# EAGLE board board comp2 12-10-12 (EAGLE 6.3), part 1 of 2
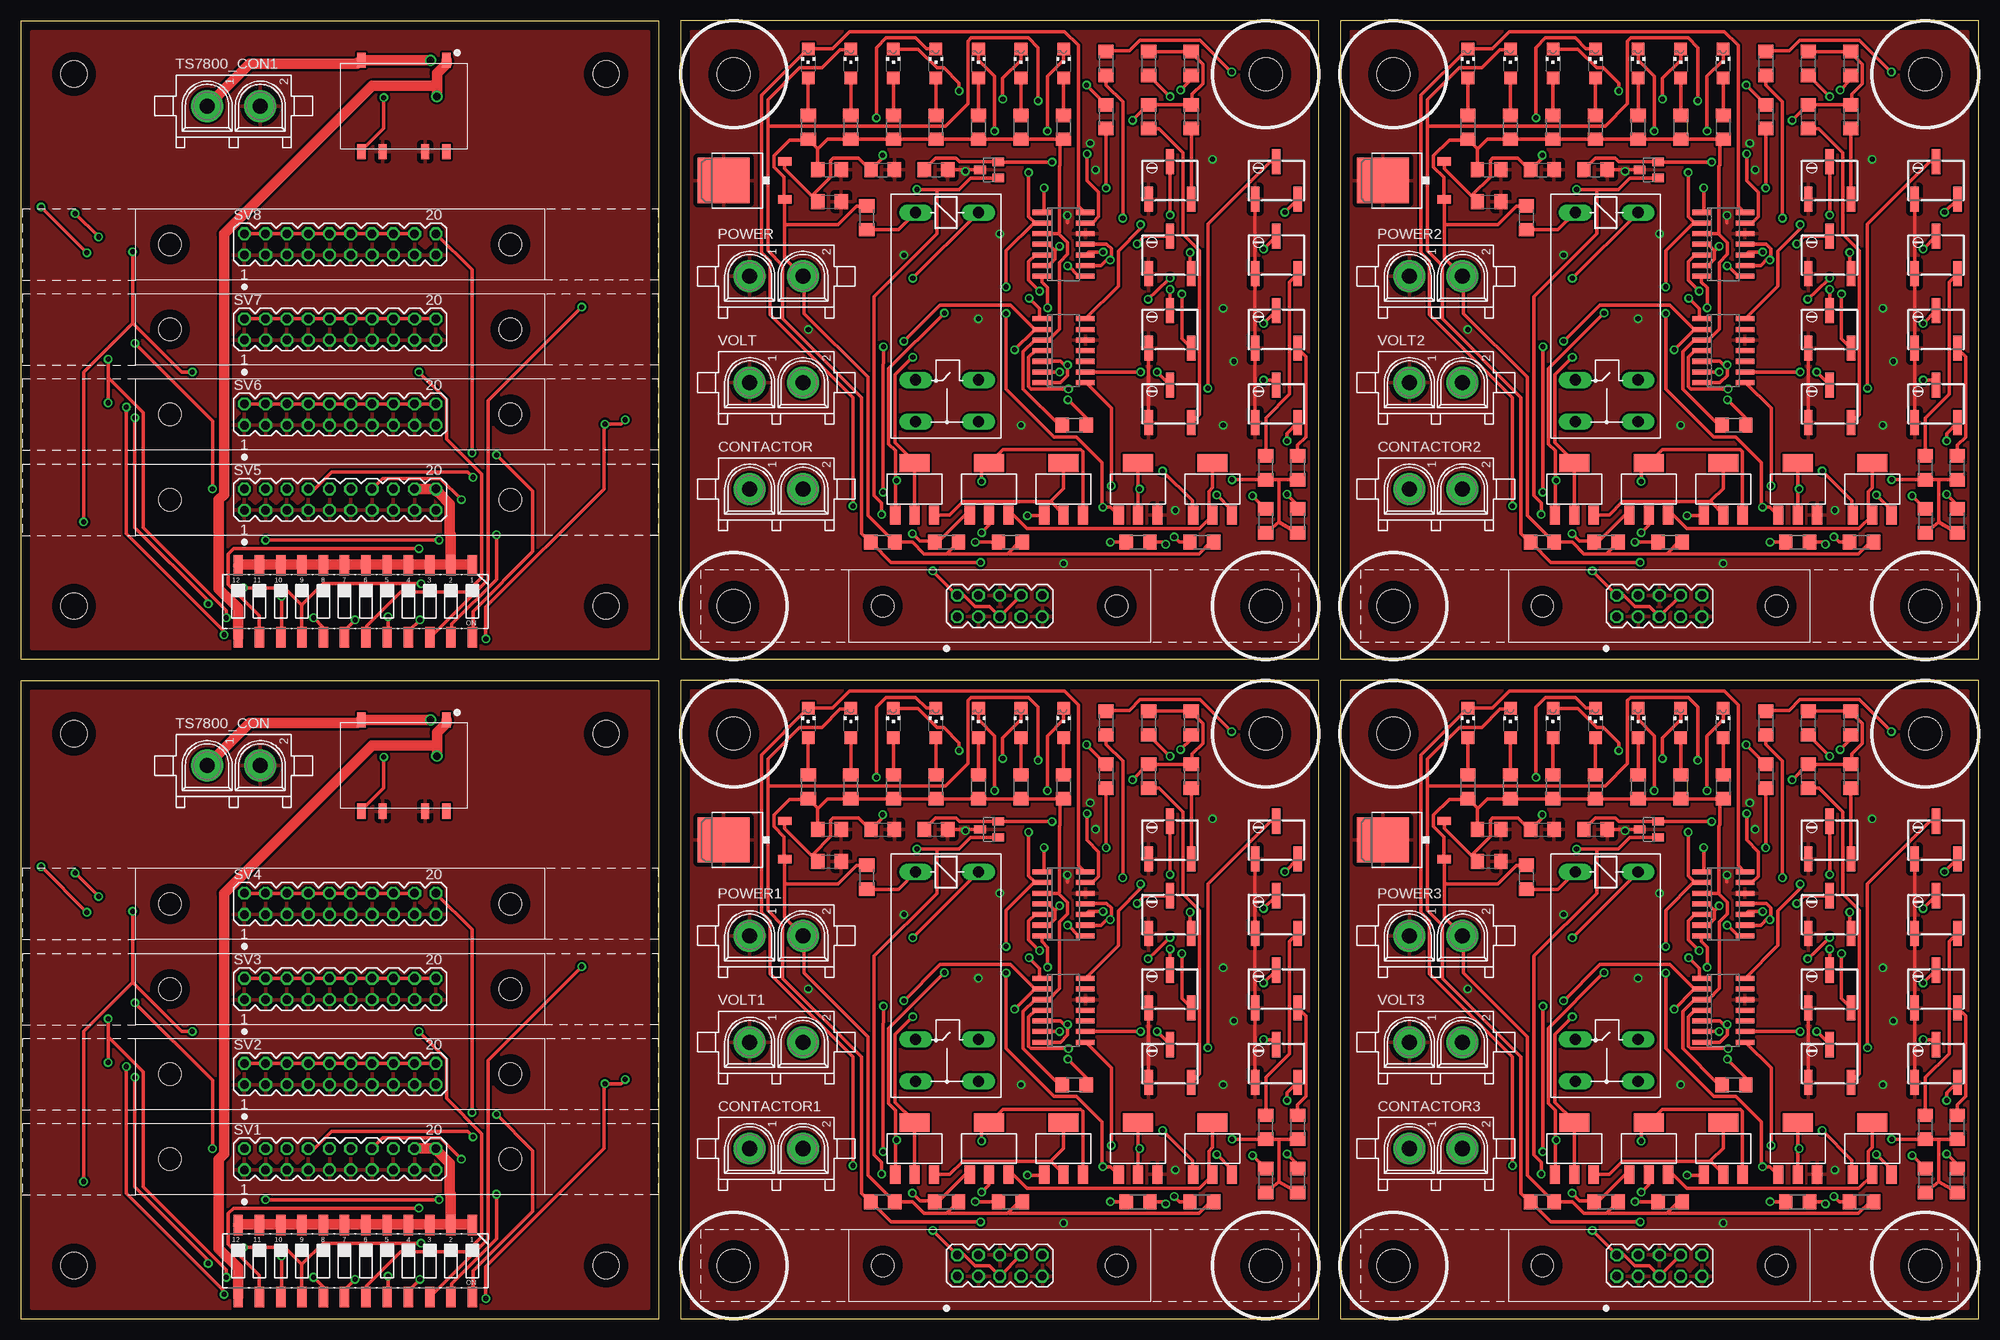
[diagram p0: board, top side]
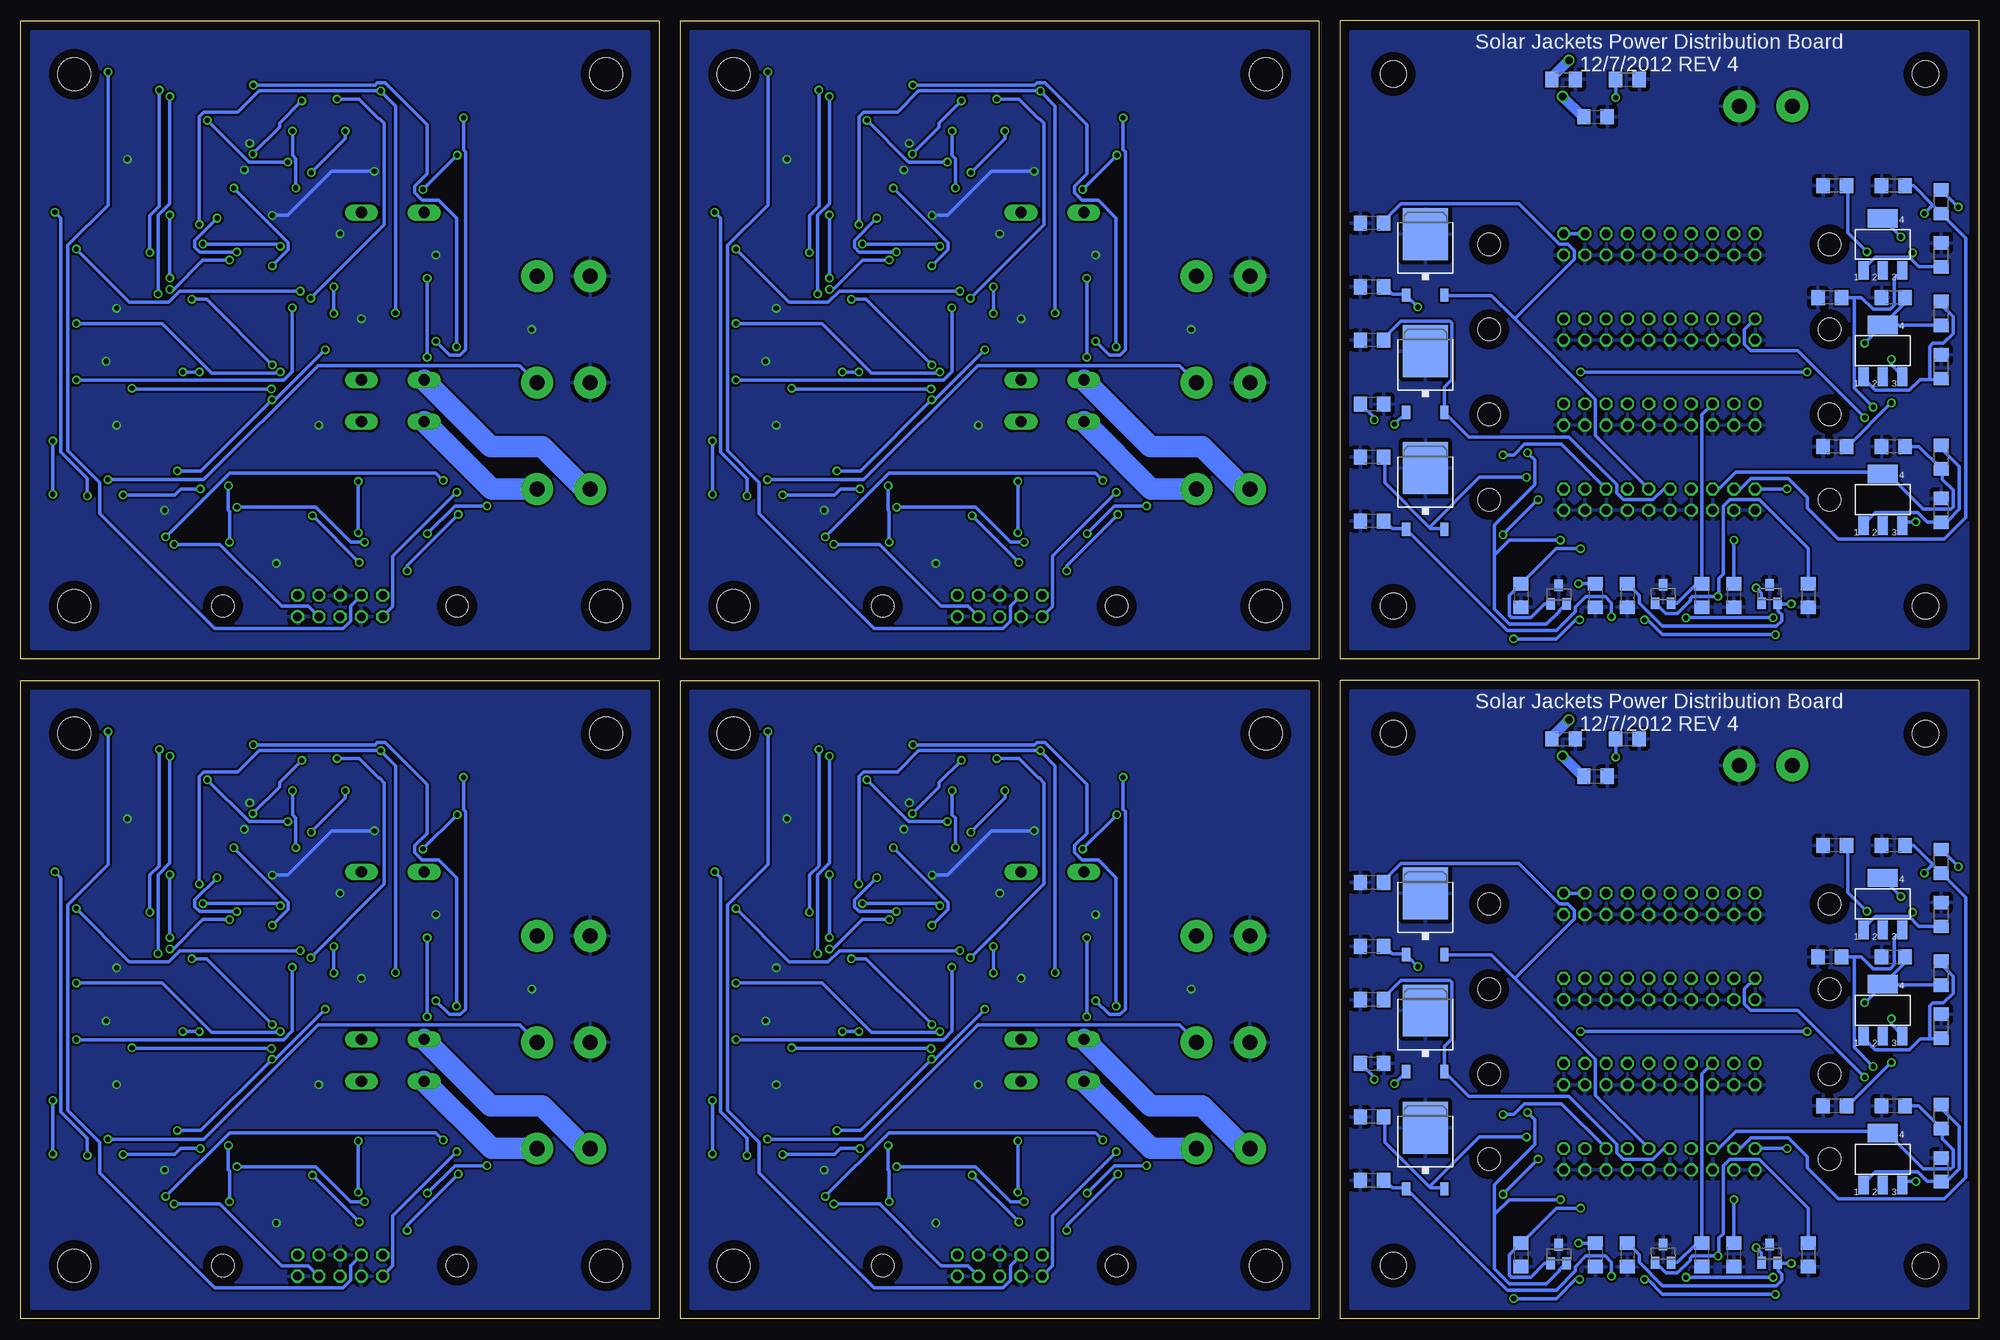
[diagram p1: board, bottom side, seen from below]

Size 233.68 x 154.94 mm. Coordinates in mm from the lower left corner, seen from the top.
Outline: 76.2,0 76.2,76.2 0,76.2 0,0 76.2,0
Outline: 76.2,78.74 76.2,154.94 0,154.94 0,78.74 76.2,78.74
Outline: 78.74,78.74 154.94,78.74 154.94,154.94 78.74,154.94 78.74,78.74
Outline: 78.74,0 154.94,0 154.94,76.2 78.74,76.2 78.74,0
Outline: 157.48,78.74 233.68,78.74 233.68,154.94 157.48,154.94 157.48,78.74
Outline: 157.48,0 233.68,0 233.68,76.2 157.48,76.2 157.48,0
Copper layers (1*16): Top 0.035mm / dielectric 1.5mm / Bottom 0.035mm
Design rules "SJ Design Rules": minimum track width 16mil, minimum drill 24mil, track to track 10mil, track to pad 10mil, pad to pad 10mil, via to via 10mil, smd to smd 10mil, copper to edge 40mil, drill to drill 10mil, minimum pad ring 10mil, minimum via ring 8mil, stop-mask expansion 4mil, vias tented up to drill 0mil, thermal gap 20mil
Net classes: 1 power: width 1.27 mm, drill 0.889 mm
Holes 3.17 mm at 69.85,6.35 6.35,6.35 6.35,69.85 69.85,69.85 69.85,85.09 6.35,85.09 6.35,148.59 69.85,148.59
Holes 3.97 mm at 85.09,85.09 148.59,148.59 85.09,148.59 148.59,85.09 85.09,6.35 148.59,69.85 85.09,69.85 148.59,6.35 163.83,85.09 227.33,148.59 163.83,148.59 227.33,85.09 163.83,6.35 227.33,69.85 163.83,69.85 227.33,6.35

## Footprints (pad centres in the part's own frame; a part is rotated, then mirrored left to right if it is on the bottom)
SOT23 = smd 1 x 1.4: 1 -0.95,-1.1; 2 0.95,-1.1; 3 0,1.1
C1206 = smd 1.6 x 1.8: 1 -1.4,0; 2 1.4,0
350428-1 = drill 1.8 pad 3.81: 1 -3.175,0; 2 3.175,0
RTRIMTS63Y = smd 1 x 3: 1 -2.55,-2.25; 2 0,2.25; 3 2.55,-2.25
SOT223 = smd 1.219 x 2.235: 1 -2.311,-3.099; 2 0,-3.099; 3 2.311,-3.099 | smd 3.6 x 2.2: 4 0,3.099
SO14 = smd 0.6 x 2.2: 1 -3.81,-2.6; 2 -2.54,-2.6; 3 -1.27,-2.6; 4 0,-2.6; 5 1.27,-2.6; 6 2.54,-2.6; 7 3.81,-2.6; 8 3.81,2.6; 9 2.54,2.6; 10 1.27,2.6; 11 0,2.6; 12 -1.27,2.6; 13 -2.54,2.6; 14 -3.81,2.6
TO252 = smd 1 x 1.6: 1 -2.28,-4.8; 2 2.28,-4.8 | smd 5.4 x 6.2: 3 0,2.5
G2REA = drill 1.321 long: 1 -2.54,-3.683; 2 -2.54,3.81; P 17.45,-3.683; P@ 17.45,3.81; S 22.454,-3.683; S@ 22.454,3.81
CHIPLED_1206 = smd 1.5 x 1.5: A 0,-1.75; C 0,1.75
R1206 = smd 1.6 x 1.803: 1 -1.422,0; 2 1.422,0
CTS-219-12 = smd 1.13 x 2.44: 1 -13.97,-4.3; 2 -11.43,-4.3; 3 -8.89,-4.3; 4 -6.35,-4.3; 5 -3.81,-4.3; 6 -1.27,-4.3; 7 1.27,-4.3; 8 3.81,-4.3; 9 6.35,-4.3; 10 8.89,-4.3; 11 11.43,-4.3; 12 13.97,-4.3; 13 13.97,4.3; 14 11.43,4.3; 15 8.89,4.3; 16 6.35,4.3; 17 3.81,4.3; 18 1.27,4.3; 19 -1.27,4.3; 20 -3.81,4.3; 21 -6.35,4.3; 22 -8.89,4.3; 23 -11.43,4.3; 24 -13.97,4.3
MA10-2 = drill 1.016 octagon: 1 -11.43,-1.27; 2 -11.43,1.27; 3 -8.89,-1.27; 4 -8.89,1.27; 5 -6.35,-1.27; 6 -6.35,1.27; 7 -3.81,-1.27; 8 -3.81,1.27; 9 -1.27,-1.27; 10 -1.27,1.27; 11 1.27,-1.27; 12 1.27,1.27; 13 3.81,-1.27; 14 3.81,1.27; 15 6.35,-1.27; 16 6.35,1.27; 17 8.89,-1.27; 18 8.89,1.27; 19 11.43,-1.27; 20 11.43,1.27 | hole 2.692: -20.32,0; 20.32,0
MA05-2 = drill 1.016 octagon: 1 -5.08,-1.27; 2 -5.08,1.27; 3 -2.54,-1.27; 4 -2.54,1.27; 5 0,-1.27; 6 0,1.27; 7 2.54,-1.27; 8 2.54,1.27; 9 5.08,-1.27; 10 5.08,1.27 | hole 2.692: -13.97,0; 13.97,0
350759-4 = drill 1.8 pad 3.81: 1 -3.175,0; 2 3.175,0
V7805 = smd 0.991 x 1.803: 1 0,0.902; 5 10.16,0.902; 6 10.16,11.798; 7 7.62,11.798; 9 2.54,11.798; 10 0,11.798

## Placement (x,y rotation side)
3V1  MAX6103  [SOT23]  24.94,86.51 0 bottom
3V2  MAX6103  [SOT23]  37.64,86.51 0 bottom
3V3  MAX6103  [SOT23]  24.94,7.77 0 bottom
3V4  MAX6103  [SOT23]  37.64,7.77 0 bottom
3V5  MAX6103  [SOT23]  50.11,7.72 0 bottom
3V6  MAX6103  [SOT23]  50.11,86.46 0 bottom
3V7  MAX6103  [SOT23]  115.57,137.16 90 top
3V8  MAX6103  [SOT23]  115.57,58.42 90 top
3V9  MAX6103  [SOT23]  194.31,137.16 90 top
3V10  MAX6103  [SOT23]  194.31,58.42 90 top
317CAP1  .33uF  [C1206]  17.14,135.25 180 bottom
317CAP2  1uF  [C1206]  10.16,104.14 180 bottom
317CAP3  .33uF  [C1206]  17.14,56.52 180 bottom
317CAP4  .33uF  [C1206]  17.78,121.92 180 bottom
317CAP5  1uF  [C1206]  10.16,135.25 180 bottom
317CAP6  .33uF  [C1206]  17.14,104.14 180 bottom
317CAP7  1uF  [C1206]  10.16,121.92 180 bottom
317CAP8  1uF  [C1206]  10.16,25.4 180 bottom
317CAP9  .33uF  [C1206]  17.78,43.18 180 bottom
317CAP10  1uF  [C1206]  10.16,56.52 180 bottom
317CAP11  .33uF  [C1206]  17.14,25.4 180 bottom
317CAP12  1uF  [C1206]  10.16,43.18 180 bottom
6103CAP1  1uF  [C1206]  45.72,86.36 270 bottom
6103CAP2  1uF  [C1206]  41.91,86.36 270 bottom
6103CAP3  1uF  [C1206]  20.32,86.36 270 bottom
6103CAP4  1uF  [C1206]  33.02,86.36 270 bottom
6103CAP5  1uF  [C1206]  54.61,86.36 270 bottom
6103CAP6  1uF  [C1206]  29.21,86.36 270 bottom
6103CAP7  1uF  [C1206]  45.72,7.62 270 bottom
6103CAP8  1uF  [C1206]  41.91,7.62 270 bottom
6103CAP9  1uF  [C1206]  20.32,7.62 270 bottom
6103CAP10  1uF  [C1206]  33.02,7.62 270 bottom
6103CAP11  1uF  [C1206]  54.61,7.62 270 bottom
6103CAP12  1uF  [C1206]  29.21,7.62 270 bottom
6103CAP13  1uF  [C1206]  102.87,137.16 0 top
6103CAP14  1uF  [C1206]  109.22,137.16 0 top
6103CAP15  1uF  [C1206]  102.87,58.42 0 top
6103CAP16  1uF  [C1206]  109.22,58.42 0 top
6103CAP17  1uF  [C1206]  181.61,137.16 0 top
6103CAP18  1uF  [C1206]  187.96,137.16 0 top
6103CAP19  1uF  [C1206]  181.61,58.42 0 top
6103CAP20  1uF  [C1206]  187.96,58.42 0 top
7805CAP1  1uF  [C1206]  96.52,137.16 0 top
7805CAP2  1uF  [C1206]  96.52,133.35 0 top
7805CAP3  1uF  [C1206]  96.52,54.61 0 top
7805CAP4  1uF  [C1206]  96.52,58.42 0 top
7805CAP5  1uF  [C1206]  175.26,133.35 0 top
7805CAP6  1uF  [C1206]  175.26,137.16 0 top
7805CAP7  1uF  [C1206]  175.26,54.61 0 top
7805CAP8  1uF  [C1206]  175.26,58.42 0 top
C1  1uF  [C1206]  72.39,44.45 180 bottom
C2  1uF  [C1206]  72.39,52.07 180 bottom
C3  1uF  [C1206]  72.39,30.48 0 bottom
C4  1uF  [C1206]  72.39,38.1 180 bottom
C5  1uF  [C1206]  72.39,16.51 180 bottom
C6  1uF  [C1206]  72.39,24.13 180 bottom
C7  1uF  [C1206]  72.39,123.19 180 bottom
C8  1uF  [C1206]  72.39,130.81 180 bottom
C9  1uF  [C1206]  72.39,109.22 0 bottom
C10  1uF  [C1206]  72.39,116.84 180 bottom
C11  1uF  [C1206]  72.39,102.87 180 bottom
C12  1uF  [C1206]  72.39,95.25 180 bottom
CONTACTOR  350428-1  [350428-1]  90.17,99.06 0 top
CONTACTOR1  350428-1  [350428-1]  90.17,20.32 0 top
CONTACTOR2  350428-1  [350428-1]  168.91,99.06 0 top
CONTACTOR3  350428-1  [350428-1]  168.91,20.32 0 top
CURRENT_TRIM  1k  [RTRIMTS63Y]  137.16,109.22 0 top
CURRENT_TRIM1  1k  [RTRIMTS63Y]  137.16,30.48 0 top
CURRENT_TRIM2  1k  [RTRIMTS63Y]  215.9,109.22 0 top
CURRENT_TRIM3  1k  [RTRIMTS63Y]  215.9,30.48 0 top
IC1  LM317  [SOT223]  11.43,97.79 0 bottom
IC2  LM317  [SOT223]  11.43,128.27 0 bottom
IC3  LM317  [SOT223]  11.43,115.57 0 bottom
IC4  LM317  [SOT223]  11.43,19.05 0 bottom
IC5  LM317  [SOT223]  11.43,49.53 0 bottom
IC6  LM317  [SOT223]  11.43,36.83 0 bottom
IC7  LM339D  [SO14]  124.46,128.27 270 top
IC8  7805DT  [TO252]  86.36,135.89 90 top
IC9  LM339D  [SO14]  124.46,115.57 270 top
IC10  LM339D  [SO14]  124.46,49.53 270 top
IC11  7805DT  [TO252]  86.36,57.15 90 top
IC12  LM339D  [SO14]  124.46,36.83 270 top
IC13  LM339D  [SO14]  203.2,128.27 270 top
IC14  7805DT  [TO252]  165.1,135.89 90 top
IC15  LM339D  [SO14]  203.2,115.57 270 top
IC16  LM339D  [SO14]  203.2,49.53 270 top
IC17  7805DT  [TO252]  165.1,57.15 90 top
IC18  LM339D  [SO14]  203.2,36.83 270 top
K1  G2REA  [G2REA]  110.49,129.54 270 top
K2  G2REA  [G2REA]  110.49,50.8 270 top
K3  G2REA  [G2REA]  189.23,129.54 270 top
K4  G2REA  [G2REA]  189.23,50.8 270 top
OVER_CRIT  10k  [RTRIMTS63Y]  149.86,135.89 0 top
OVER_CRIT1  10k  [RTRIMTS63Y]  149.86,57.15 0 top
OVER_CRIT2  10k  [RTRIMTS63Y]  228.6,135.89 0 top
OVER_CRIT3  10k  [RTRIMTS63Y]  228.6,57.15 0 top
OVER_TRIM  1k  [RTRIMTS63Y]  137.16,135.89 0 top
OVER_TRIM1  1k  [RTRIMTS63Y]  137.16,57.15 0 top
OVER_TRIM2  1k  [RTRIMTS63Y]  215.9,135.89 0 top
OVER_TRIM3  1k  [RTRIMTS63Y]  215.9,57.15 0 top
OVER_WARN  10k  [RTRIMTS63Y]  149.86,118.11 0 top
OVER_WARN1  10k  [RTRIMTS63Y]  149.86,39.37 0 top
OVER_WARN2  10k  [RTRIMTS63Y]  228.6,118.11 0 top
OVER_WARN3  10k  [RTRIMTS63Y]  228.6,39.37 0 top
OVERCURRENT  [CHIPLED_1206]  104.14,149.86 0 top
OVERCURRENT1  [CHIPLED_1206]  104.14,71.12 0 top
OVERCURRENT2  [CHIPLED_1206]  182.88,149.86 0 top
OVERCURRENT3  [CHIPLED_1206]  182.88,71.12 0 top
OVERCURRENT_FET  N-HEXFET-2D_SOT232-  [SOT223]  106.68,99.06 0 top
OVERCURRENT_FET1  N-HEXFET-2D_SOT232-  [SOT223]  106.68,20.32 0 top
OVERCURRENT_FET2  N-HEXFET-2D_SOT232-  [SOT223]  185.42,99.06 0 top
OVERCURRENT_FET3  N-HEXFET-2D_SOT232-  [SOT223]  185.42,20.32 0 top
OVERTEMP1  [CHIPLED_1206]  93.98,149.86 0 top
OVERTEMP1_FET  N-HEXFET-2D_SOT232-  [SOT223]  115.57,99.06 0 top
OVERTEMP1_FET1  N-HEXFET-2D_SOT232-  [SOT223]  115.57,20.32 0 top
OVERTEMP1_FET2  N-HEXFET-2D_SOT232-  [SOT223]  194.31,99.06 0 top
OVERTEMP1_FET3  N-HEXFET-2D_SOT232-  [SOT223]  194.31,20.32 0 top
OVERTEMP2  [CHIPLED_1206]  99.06,149.86 0 top
OVERTEMP2_FET  N-HEXFET-2D_SOT232-  [SOT223]  124.46,99.06 0 top
OVERTEMP2_FET1  N-HEXFET-2D_SOT232-  [SOT223]  124.46,20.32 0 top
OVERTEMP2_FET2  N-HEXFET-2D_SOT232-  [SOT223]  203.2,99.06 0 top
OVERTEMP2_FET3  N-HEXFET-2D_SOT232-  [SOT223]  203.2,20.32 0 top
OVERTEMP3  [CHIPLED_1206]  93.98,71.12 0 top
OVERTEMP4  [CHIPLED_1206]  99.06,71.12 0 top
OVERTEMP5  [CHIPLED_1206]  172.72,149.86 0 top
OVERTEMP6  [CHIPLED_1206]  177.8,149.86 0 top
OVERTEMP7  [CHIPLED_1206]  172.72,71.12 0 top
OVERTEMP8  [CHIPLED_1206]  177.8,71.12 0 top
OVERVOLT  [CHIPLED_1206]  109.22,149.86 0 top
OVERVOLT1  [CHIPLED_1206]  109.22,71.12 0 top
OVERVOLT2  [CHIPLED_1206]  187.96,149.86 0 top
OVERVOLT3  [CHIPLED_1206]  187.96,71.12 0 top
OVERVOLT_FET  N-HEXFET-2D_SOT232-  [SOT223]  142.24,99.06 0 top
OVERVOLT_FET1  N-HEXFET-2D_SOT232-  [SOT223]  142.24,20.32 0 top
OVERVOLT_FET2  N-HEXFET-2D_SOT232-  [SOT223]  220.98,99.06 0 top
OVERVOLT_FET3  N-HEXFET-2D_SOT232-  [SOT223]  220.98,20.32 0 top
OVERVOLT_WARN  [CHIPLED_1206]  119.38,149.86 0 top
OVERVOLT_WARN1  [CHIPLED_1206]  119.38,71.12 0 top
OVERVOLT_WARN2  [CHIPLED_1206]  198.12,149.86 0 top
OVERVOLT_WARN3  [CHIPLED_1206]  198.12,71.12 0 top
POWER  350428-1  [350428-1]  90.17,124.46 0 top
POWER1  350428-1  [350428-1]  90.17,45.72 0 top
POWER2  350428-1  [350428-1]  168.91,124.46 0 top
POWER3  350428-1  [350428-1]  168.91,45.72 0 top
PWR_1  7805DT  [TO252]  66.04,48.26 0 bottom
PWR_2  7805DT  [TO252]  66.04,34.29 0 bottom
PWR_3  7805DT  [TO252]  66.04,20.32 0 bottom
PWR_4  7805DT  [TO252]  66.04,127 0 bottom
PWR_5  7805DT  [TO252]  66.04,113.03 0 bottom
PWR_6  7805DT  [TO252]  66.04,99.06 0 bottom
R1  220  [R1206]  4.45,102.87 90 bottom
R2  361  [R1206]  4.45,96.52 90 bottom
R3  220  [R1206]  4.45,133.35 90 bottom
R4  361  [R1206]  4.45,127 90 bottom
R5  220  [R1206]  4.45,120.02 90 bottom
R6  361  [R1206]  4.45,113.67 90 bottom
R7  220  [R1206]  4.45,24.13 90 bottom
R8  361  [R1206]  4.45,17.78 90 bottom
R9  220  [R1206]  4.45,54.61 90 bottom
R10  361  [R1206]  4.45,48.26 90 bottom
R11  220  [R1206]  4.45,41.27 90 bottom
R12  361  [R1206]  4.45,34.92 90 bottom
R13  100k  [R1206]  148.59,101.6 270 top
R14  100k  [R1206]  152.4,95.25 270 top
R15  100  [R1206]  129.54,143.51 90 top
R16  100  [R1206]  129.54,149.86 90 top
R17  100  [R1206]  134.62,149.86 90 top
R18  100  [R1206]  139.7,149.86 90 top
R19  1k  [R1206]  114.3,142.24 270 top
R20  1k  [R1206]  124.46,142.24 270 top
R21  1k  [R1206]  93.98,142.24 270 top
R22  1k  [R1206]  99.06,142.24 270 top
R23  10k  [R1206]  118.11,92.71 0 top
R24  100  [R1206]  100.97,131.44 90 top
R25  10k  [R1206]  125.73,106.68 180 top
R26  10k  [R1206]  110.49,92.71 0 top
R27  10k  [R1206]  102.87,92.71 0 top
R28  10k  [R1206]  140.97,92.71 0 top
R29  100k  [R1206]  148.59,95.25 270 top
R30  100k  [R1206]  152.4,101.6 270 top
R31  1k  [R1206]  133.35,92.71 0 top
R32  100  [R1206]  134.62,143.51 90 top
R33  100  [R1206]  139.7,143.51 90 top
R34  1k  [R1206]  109.22,142.24 270 top
R35  1k  [R1206]  119.38,142.24 270 top
R36  1k  [R1206]  104.14,142.24 270 top
R37  100k  [R1206]  148.59,22.86 270 top
R38  100k  [R1206]  152.4,16.51 270 top
R39  100  [R1206]  129.54,64.77 90 top
R40  100  [R1206]  129.54,71.12 90 top
R41  100  [R1206]  134.62,71.12 90 top
R42  100  [R1206]  139.7,71.12 90 top
R43  1k  [R1206]  114.3,63.5 270 top
R44  1k  [R1206]  124.46,63.5 270 top
R45  1k  [R1206]  93.98,63.5 270 top
R46  1k  [R1206]  99.06,63.5 270 top
R47  10k  [R1206]  118.11,13.97 0 top
R48  100  [R1206]  100.97,52.7 90 top
R49  10k  [R1206]  125.73,27.94 180 top
R50  10k  [R1206]  110.49,13.97 0 top
R51  10k  [R1206]  102.87,13.97 0 top
R52  10k  [R1206]  140.97,13.97 0 top
R53  100k  [R1206]  148.59,16.51 270 top
R54  100k  [R1206]  152.4,22.86 270 top
R55  1k  [R1206]  133.35,13.97 0 top
R56  100  [R1206]  134.62,64.77 90 top
R57  100  [R1206]  139.7,64.77 90 top
R58  1k  [R1206]  109.22,63.5 270 top
R59  1k  [R1206]  119.38,63.5 270 top
R60  1k  [R1206]  104.14,63.5 270 top
R61  100k  [R1206]  227.33,101.6 270 top
R62  100k  [R1206]  231.14,95.25 270 top
R63  100  [R1206]  208.28,143.51 90 top
R64  100  [R1206]  208.28,149.86 90 top
R65  100  [R1206]  213.36,149.86 90 top
R66  100  [R1206]  218.44,149.86 90 top
R67  1k  [R1206]  193.04,142.24 270 top
R68  1k  [R1206]  203.2,142.24 270 top
R69  1k  [R1206]  172.72,142.24 270 top
R70  1k  [R1206]  177.8,142.24 270 top
R71  10k  [R1206]  196.85,92.71 0 top
R72  100  [R1206]  179.71,131.44 90 top
R73  10k  [R1206]  204.47,106.68 180 top
R74  10k  [R1206]  189.23,92.71 0 top
R75  10k  [R1206]  181.61,92.71 0 top
R76  10k  [R1206]  219.71,92.71 0 top
R77  100k  [R1206]  227.33,95.25 270 top
R78  100k  [R1206]  231.14,101.6 270 top
R79  1k  [R1206]  212.09,92.71 0 top
R80  100  [R1206]  213.36,143.51 90 top
R81  100  [R1206]  218.44,143.51 90 top
R82  1k  [R1206]  187.96,142.24 270 top
R83  1k  [R1206]  198.12,142.24 270 top
R84  1k  [R1206]  182.88,142.24 270 top
R85  100k  [R1206]  227.33,22.86 270 top
R86  100k  [R1206]  231.14,16.51 270 top
R87  100  [R1206]  208.28,64.77 90 top
R88  100  [R1206]  208.28,71.12 90 top
R89  100  [R1206]  213.36,71.12 90 top
R90  100  [R1206]  218.44,71.12 90 top
R91  1k  [R1206]  193.04,63.5 270 top
R92  1k  [R1206]  203.2,63.5 270 top
R93  1k  [R1206]  172.72,63.5 270 top
R94  1k  [R1206]  177.8,63.5 270 top
R95  10k  [R1206]  196.85,13.97 0 top
R96  100  [R1206]  179.71,52.7 90 top
R97  10k  [R1206]  204.47,27.94 180 top
R98  10k  [R1206]  189.23,13.97 0 top
R99  10k  [R1206]  181.61,13.97 0 top
R100  10k  [R1206]  219.71,13.97 0 top
R101  100k  [R1206]  227.33,16.51 270 top
R102  100k  [R1206]  231.14,22.86 270 top
R103  1k  [R1206]  212.09,13.97 0 top
R104  100  [R1206]  213.36,64.77 90 top
R105  100  [R1206]  218.44,64.77 90 top
R106  1k  [R1206]  187.96,63.5 270 top
R107  1k  [R1206]  198.12,63.5 270 top
R108  1k  [R1206]  182.88,63.5 270 top
S1  219-12  [CTS-219-12]  39.9,6.91 180 top
S2  219-12  [CTS-219-12]  39.9,85.65 180 top
SV1  AMPLATCH-20  [MA10-2]  38.1,19.05 0 top
SV2  AMPLATCH-20  [MA10-2]  38.1,29.21 0 top
SV3  AMPLATCH-20  [MA10-2]  38.1,39.37 0 top
SV4  AMPLATCH-20  [MA10-2]  38.1,49.53 0 top
SV5  AMPLATCH-20  [MA10-2]  38.1,97.79 0 top
SV6  AMPLATCH-20  [MA10-2]  38.1,107.95 0 top
SV7  AMPLATCH-20  [MA10-2]  38.1,118.11 0 top
SV8  AMPLATCH-20  [MA10-2]  38.1,128.27 0 top
SV9  AMP_LATCH_10  [MA05-2]  116.84,85.09 0 top
SV10  AMP_LATCH_10  [MA05-2]  116.84,6.35 0 top
SV11  AMP_LATCH_10  [MA05-2]  195.58,85.09 0 top
SV12  AMP_LATCH_10  [MA05-2]  195.58,6.35 0 top
TEMP_TRIM  1k  [RTRIMTS63Y]  137.16,118.11 0 top
TEMP_TRIM1  1k  [RTRIMTS63Y]  137.16,39.37 0 top
TEMP_TRIM2  1k  [RTRIMTS63Y]  215.9,118.11 0 top
TEMP_TRIM3  1k  [RTRIMTS63Y]  215.9,39.37 0 top
TS7800_CON  350759-4  [350759-4]  25.4,66.04 0 top
TS7800_CON1  350759-4  [350759-4]  25.4,144.78 0 top
U$1  V7805  [V7805]  50.8,151.13 180 top
U$2  V7805  [V7805]  50.8,72.39 180 top
UNDER_CRIT  10k  [RTRIMTS63Y]  149.86,127 0 top
UNDER_CRIT1  10k  [RTRIMTS63Y]  149.86,48.26 0 top
UNDER_CRIT2  10k  [RTRIMTS63Y]  228.6,127 0 top
UNDER_CRIT3  10k  [RTRIMTS63Y]  228.6,48.26 0 top
UNDER_TRIM  1k  [RTRIMTS63Y]  137.16,127 0 top
UNDER_TRIM1  1k  [RTRIMTS63Y]  137.16,48.26 0 top
UNDER_TRIM2  1k  [RTRIMTS63Y]  215.9,127 0 top
UNDER_TRIM3  1k  [RTRIMTS63Y]  215.9,48.26 0 top
UNDER_WARN  10k  [RTRIMTS63Y]  149.86,109.22 0 top
UNDER_WARN1  10k  [RTRIMTS63Y]  149.86,30.48 0 top
UNDER_WARN2  10k  [RTRIMTS63Y]  228.6,109.22 0 top
UNDER_WARN3  10k  [RTRIMTS63Y]  228.6,30.48 0 top
UNDERVOLT  [CHIPLED_1206]  114.3,149.86 0 top
UNDERVOLT1  [CHIPLED_1206]  114.3,71.12 0 top
UNDERVOLT2  [CHIPLED_1206]  193.04,149.86 0 top
UNDERVOLT3  [CHIPLED_1206]  193.04,71.12 0 top
UNDERVOLT_FET  N-HEXFET-2D_SOT232-  [SOT223]  133.35,99.06 0 top
UNDERVOLT_FET1  N-HEXFET-2D_SOT232-  [SOT223]  133.35,20.32 0 top
UNDERVOLT_FET2  N-HEXFET-2D_SOT232-  [SOT223]  212.09,99.06 0 top
UNDERVOLT_FET3  N-HEXFET-2D_SOT232-  [SOT223]  212.09,20.32 0 top
UNDERVOLT_WARN  [CHIPLED_1206]  124.46,149.86 0 top
UNDERVOLT_WARN1  [CHIPLED_1206]  124.46,71.12 0 top
UNDERVOLT_WARN2  [CHIPLED_1206]  203.2,149.86 0 top
UNDERVOLT_WARN3  [CHIPLED_1206]  203.2,71.12 0 top
V7805_C1  1uF  [C1206]  41.91,147.96 0 bottom
V7805_C2  1uF  [C1206]  45.72,143.51 0 bottom
V7805_C3  1uF  [C1206]  49.53,147.96 0 bottom
V7805_C4  1uF  [C1206]  41.91,69.22 0 bottom
V7805_C5  1uF  [C1206]  45.72,64.77 0 bottom
V7805_C6  1uF  [C1206]  49.53,69.22 0 bottom
VOLT  350428-1  [350428-1]  90.17,111.76 0 top
VOLT1  350428-1  [350428-1]  90.17,33.02 0 top
VOLT2  350428-1  [350428-1]  168.91,111.76 0 top
VOLT3  350428-1  [350428-1]  168.91,33.02 0 top

## Library data of the parts
3V1-3V10 = SolarJacketsADC
317CAP1-317CAP12 6103CAP1-6103CAP20 7805CAP1-7805CAP8 C1-C12 CURRENT_TRIM CURRENT_TRIM1-CURRENT_TRIM3 OVER_CRIT OVER_CRIT1-OVER_CRIT3 OVER_TRIM OVER_TRIM1-OVER_TRIM3 OVER_WARN OVER_WARN1-OVER_WARN3 R1-R108 TEMP_TRIM TEMP_TRIM1-TEMP_TRIM3 UNDER_CRIT UNDER_CRIT1-UNDER_CRIT3 UNDER_TRIM UNDER_TRIM1-UNDER_TRIM3 UNDER_WARN UNDER_WARN1-UNDER_WARN3 V7805_C1-V7805_C6 = rcl
CONTACTOR CONTACTOR1-CONTACTOR3 POWER POWER1-POWER3 VOLT VOLT1-VOLT3 = con-amp
IC1-IC18 PWR_1-PWR_6 = linear
K1-K4 = relay; OC_FARNELL: unknown; OC_NEWARK: unknown
OVERCURRENT OVERCURRENT1-OVERCURRENT3 OVERTEMP1-OVERTEMP8 OVERVOLT OVERVOLT1-OVERVOLT3 OVERVOLT_WARN OVERVOLT_WARN1-OVERVOLT_WARN3 UNDERVOLT UNDERVOLT1-UNDERVOLT3 UNDERVOLT_WARN UNDERVOLT_WARN1-UNDERVOLT_WARN3 = led
OVERCURRENT_FET OVERCURRENT_FET1-OVERCURRENT_FET3 OVERTEMP1_FET OVERTEMP1_FET1-OVERTEMP1_FET3 OVERTEMP2_FET OVERTEMP2_FET1-OVERTEMP2_FET3 OVERVOLT_FET OVERVOLT_FET1-OVERVOLT_FET3 UNDERVOLT_FET UNDERVOLT_FET1-UNDERVOLT_FET3 = transistor-power
S1 S2 = switch-dil; OC_FARNELL: unknown; OC_NEWARK: unknown
SV1-SV8 = SolarJacketsADC; PART_NUM: 5499160-1
SV9-SV12 = SolarJacketsADC; PART_NUM: 5499922-1
TS7800_CON TS7800_CON1 = con-amp; NEG: -; POS: +
U$1 U$2 = V7805

## Nets
3.3V1: 317CAP8.1 IC4.4 R7.1 SV1.6
3.3V1_EN: 317CAP3.1 IC4.3 S1.19
3.3V1_EN1: 317CAP1.1 IC1.3 S2.19
3.3V2: 317CAP10.1 IC5.4 R9.1 SV1.4
3.3V2_EN: 317CAP9.1 IC5.3 S1.18
3.3V2_EN1: 317CAP4.1 IC2.3 S2.18
3.3V3: 317CAP12.1 IC6.4 R11.1 SV1.2
3.3V3_EN: 317CAP11.1 IC6.3 S1.17
3.3V3_EN1: 317CAP6.1 IC3.3 S2.17
3.3V4: 317CAP7.1 IC3.4 R5.1 SV5.2
3.3V5: 317CAP2.1 IC1.4 R1.1 SV5.6
3.3V6: 317CAP5.1 IC2.4 R3.1 SV5.4
5V: 3V7.1 6103CAP13.1 7805CAP2.1 IC8.2 SV9.2 SV9.5 SV9.8
5V1: C2.1 PWR_1.2 SV1.12
5V1_EN: C1.1 PWR_1.1 S1.22
5V1_EN1: C7.1 PWR_4.1 S2.22
5V2: C4.1 PWR_2.2 SV1.10
5V2_EN: C3.1 PWR_2.1 S1.21
5V2_EN1: C9.1 PWR_5.1 S2.21
5V3: C6.1 PWR_3.2 SV1.8
5V3_EN: C5.1 PWR_3.1 S1.20
5V3_EN1: C12.1 PWR_6.1 S2.20
5V4: C11.1 PWR_6.2 SV5.8
5V5: C10.1 PWR_5.2 SV5.10
5V6: C8.1 PWR_4.2 SV5.12
5V7: 3V8.1 6103CAP15.1 7805CAP3.1 IC11.2 SV10.2 SV10.5 SV10.8
5V8: 3V9.1 6103CAP17.1 7805CAP5.1 IC14.2 SV11.2 SV11.5 SV11.8
5V9: 3V10.1 6103CAP19.1 7805CAP7.1 IC17.2 SV12.2 SV12.5 SV12.8
12V [power]: S1.1 S1.2 S1.3 S1.4 S1.5 S1.6 S1.7 S1.8 S1.9 S1.10 S1.11 S1.12 SV1.18 SV1.20
12V1 [power]: S2.1 S2.2 S2.3 S2.4 S2.5 S2.6 S2.7 S2.8 S2.9 S2.10 S2.11 S2.12 SV5.18 SV5.20
12V1_EN: S1.24 SV1.16
12V1_EN1: S2.24 SV5.16
12V2: 7805CAP1.1 IC7.3 IC8.1 IC9.3 POWER.2 R19.2 R20.2 R21.2 R22.2 R23.2 R24.2 R25.2 R26.2 R27.2 R28.2 R34.2 R35.2 R36.2
12V2_EN: S1.23 SV1.14
12V2_EN1: S2.23 SV5.14
12V3: 7805CAP4.1 IC10.3 IC11.1 IC12.3 POWER1.2 R43.2 R44.2 R45.2 R46.2 R47.2 R48.2 R49.2 R50.2 R51.2 R52.2 R58.2 R59.2 R60.2
12V4: 7805CAP6.1 IC13.3 IC14.1 IC15.3 POWER2.2 R67.2 R68.2 R69.2 R70.2 R71.2 R72.2 R73.2 R74.2 R75.2 R76.2 R82.2 R83.2 R84.2
12V5: 7805CAP8.1 IC16.3 IC17.1 IC18.3 POWER3.2 R91.2 R92.2 R93.2 R94.2 R95.2 R96.2 R97.2 R98.2 R99.2 R100.2 R106.2 R107.2 R108.2
96V: R13.2 R14.2 R29.2 R30.2 VOLT.2
96V1: R37.2 R38.2 R53.2 R54.2 VOLT1.2
96V2: R61.2 R62.2 R77.2 R78.2 VOLT2.2
96V3: R85.2 R86.2 R101.2 R102.2 VOLT3.2
CONTACTOR_IN: CONTACTOR.2 K1.S
CONTACTOR_IN1: CONTACTOR1.2 K2.S
CONTACTOR_IN2: CONTACTOR2.2 K3.S
CONTACTOR_IN3: CONTACTOR3.2 K4.S
CONTACTOR_OUT: CONTACTOR.1 K1.P
CONTACTOR_OUT1: CONTACTOR1.1 K2.P
CONTACTOR_OUT2: CONTACTOR2.1 K3.P
CONTACTOR_OUT3: CONTACTOR3.1 K4.P
CURRENT: R31.2 SV9.7
CURRENT1: R55.2 SV10.7
CURRENT2: R79.2 SV11.7
CURRENT3: R103.2 SV12.7
GND: 3V3.3 3V4.3 3V5.3 317CAP3.2 317CAP8.2 317CAP9.2 317CAP10.2 317CAP11.2 317CAP12.2 6103CAP7.2 6103CAP8.2 6103CAP9.2 6103CAP10.2 6103CAP11.2 6103CAP12.2 C1.2 C2.2 C3.2 C4.2 C5.2 C6.2 PWR_1.3 PWR_2.3 PWR_3.3 R8.2 R10.2 R12.2 SV1.1 SV1.3 SV1.5 SV1.7 SV1.9 SV1.11 SV1.13 SV1.15 SV1.17 SV1.19 SV2.1 SV2.3 SV2.5 SV2.7 SV2.9 SV2.11 SV2.13 SV2.15 SV2.17 SV2.19 SV3.1 SV3.3 SV3.5 SV3.7 SV3.9 SV3.11 SV3.13 SV3.15 SV3.17 SV3.19 SV4.1 SV4.3 SV4.5 SV4.7 SV4.9 SV4.11 SV4.13 SV4.15 SV4.17 SV4.19 TS7800_CON.2 U$2.7 U$2.9 V7805_C4.2 V7805_C5.2 V7805_C6.2
GND1: 3V1.3 3V2.3 3V6.3 317CAP1.2 317CAP2.2 317CAP4.2 317CAP5.2 317CAP6.2 317CAP7.2 6103CAP1.2 6103CAP2.2 6103CAP3.2 6103CAP4.2 6103CAP5.2 6103CAP6.2 C7.2 C8.2 C9.2 C10.2 C11.2 C12.2 PWR_4.3 PWR_5.3 PWR_6.3 R2.2 R4.2 R6.2 SV5.1 SV5.3 SV5.5 SV5.7 SV5.9 SV5.11 SV5.13 SV5.15 SV5.17 SV5.19 SV6.1 SV6.3 SV6.5 SV6.7 SV6.9 SV6.11 SV6.13 SV6.15 SV6.17 SV6.19 SV7.1 SV7.3 SV7.5 SV7.7 SV7.9 SV7.11 SV7.13 SV7.15 SV7.17 SV7.19 SV8.1 SV8.3 SV8.5 SV8.7 SV8.9 SV8.11 SV8.13 SV8.15 SV8.17 SV8.19 TS7800_CON1.2 U$1.7 U$1.9 V7805_C1.2 V7805_C2.2 V7805_C3.2
GND2: 3V7.3 6103CAP13.2 6103CAP14.2 7805CAP1.2 7805CAP2.2 CURRENT_TRIM.1 IC7.12 IC8.3 IC9.12 OVER_CRIT.1 OVER_TRIM.1 OVER_WARN.1 POWER.1 SV9.3 SV9.6 SV9.9 TEMP_TRIM.1 UNDER_CRIT.1 UNDER_TRIM.1 UNDER_WARN.1 UNDERVOLT_FET.3 VOLT.1
GND3: 3V8.3 6103CAP15.2 6103CAP16.2 7805CAP3.2 7805CAP4.2 CURRENT_TRIM1.1 IC10.12 IC11.3 IC12.12 OVER_CRIT1.1 OVER_TRIM1.1 OVER_WARN1.1 POWER1.1 SV10.3 SV10.6 SV10.9 TEMP_TRIM1.1 UNDER_CRIT1.1 UNDER_TRIM1.1 UNDER_WARN1.1 UNDERVOLT_FET1.3 VOLT1.1
GND4: 3V9.3 6103CAP17.2 6103CAP18.2 7805CAP5.2 7805CAP6.2 CURRENT_TRIM2.1 IC13.12 IC14.3 IC15.12 OVER_CRIT2.1 OVER_TRIM2.1 OVER_WARN2.1 POWER2.1 SV11.3 SV11.6 SV11.9 TEMP_TRIM2.1 UNDER_CRIT2.1 UNDER_TRIM2.1 UNDER_WARN2.1 UNDERVOLT_FET2.3 VOLT2.1
GND5: 3V10.3 6103CAP19.2 6103CAP20.2 7805CAP7.2 7805CAP8.2 CURRENT_TRIM3.1 IC16.12 IC17.3 IC18.12 OVER_CRIT3.1 OVER_TRIM3.1 OVER_WARN3.1 POWER3.1 SV12.3 SV12.6 SV12.9 TEMP_TRIM3.1 UNDER_CRIT3.1 UNDER_TRIM3.1 UNDER_WARN3.1 UNDERVOLT_FET3.3 VOLT3.1
N$1: U$2.6 V7805_C4.1
N$2: IC1.1 R1.2 R2.1
N$3: IC2.1 R3.2 R4.1
N$4: IC3.1 R5.2 R6.1
N$5: U$1.6 V7805_C1.1
N$6: IC7.7 UNDER_WARN.2
N$7: IC7.5 UNDER_CRIT.2
N$8: IC7.9 IC7.11 TEMP_TRIM.2
N$9: R13.1 UNDER_CRIT.3
N$10: R14.1 UNDER_WARN.3
N$11: IC7.4 IC7.6 UNDER_TRIM.2
N$12: IC4.1 R7.2 R8.1
N$13: IC5.1 R9.2 R10.1
N$14: IC6.1 R11.2 R12.1
N$15: R18.1 UNDER_TRIM.3
N$16: R17.1 TEMP_TRIM.3
N$17: R19.1 UNDERVOLT.A
N$18: R20.1 UNDERVOLT_WARN.A
N$19: OVERTEMP1.A R21.1
N$20: OVERTEMP2.A R22.1
N$21: IC7.8 R15.1
N$22: IC7.10 R16.1
N$23: CURRENT_TRIM.2 IC9.9
N$24: OVER_WARN.3 R30.1
N$25: IC9.6 OVER_WARN.2
N$26: IC9.4 OVER_CRIT.2
N$27: IC9.5 IC9.7 OVER_TRIM.2
N$28: OVER_TRIM.3 R33.1
N$29: CURRENT_TRIM.3 R32.1
N$30: OVERVOLT.A R34.1
N$31: OVERVOLT_WARN.A R35.1
N$32: OVERCURRENT.A R36.1
N$33: OVER_CRIT.3 R29.1
N$34: IC9.8 R31.1
N$35: K1.1 R24.1
N$36: K1.2 OVERCURRENT_FET.2 OVERCURRENT_FET.4
N$37: OVERCURRENT_FET.3 OVERTEMP2_FET.2 OVERTEMP2_FET.4
N$38: OVERTEMP1_FET.2 OVERTEMP1_FET.4 OVERTEMP2_FET.3
N$39: OVERTEMP1_FET.3 OVERVOLT_FET.2 OVERVOLT_FET.4
N$40: OVERVOLT_FET.3 UNDERVOLT_FET.2 UNDERVOLT_FET.4
N$41: IC10.7 UNDER_WARN1.2
N$42: IC10.5 UNDER_CRIT1.2
N$43: IC10.9 IC10.11 TEMP_TRIM1.2
N$44: R37.1 UNDER_CRIT1.3
N$45: R38.1 UNDER_WARN1.3
N$46: IC10.4 IC10.6 UNDER_TRIM1.2
N$47: R42.1 UNDER_TRIM1.3
N$48: R41.1 TEMP_TRIM1.3
N$49: R43.1 UNDERVOLT1.A
N$50: R44.1 UNDERVOLT_WARN1.A
N$51: OVERTEMP3.A R45.1
N$52: OVERTEMP4.A R46.1
N$53: IC10.8 R39.1
N$54: IC10.10 R40.1
N$55: CURRENT_TRIM1.2 IC12.9
N$56: OVER_WARN1.3 R54.1
N$57: IC12.5 IC12.7 OVER_TRIM1.2
N$58: OVER_TRIM1.3 R57.1
N$59: CURRENT_TRIM1.3 R56.1
N$60: OVERVOLT1.A R58.1
N$61: OVERVOLT_WARN1.A R59.1
N$62: OVERCURRENT1.A R60.1
N$63: IC12.6 OVER_WARN1.2
N$64: IC12.4 OVER_CRIT1.2
N$65: OVER_CRIT1.3 R53.1
N$66: IC12.8 R55.1
N$67: K2.1 R48.1
N$68: K2.2 OVERCURRENT_FET1.2 OVERCURRENT_FET1.4
N$69: OVERCURRENT_FET1.3 OVERTEMP2_FET1.2 OVERTEMP2_FET1.4
N$70: OVERTEMP1_FET1.2 OVERTEMP1_FET1.4 OVERTEMP2_FET1.3
N$71: OVERTEMP1_FET1.3 OVERVOLT_FET1.2 OVERVOLT_FET1.4
N$72: OVERVOLT_FET1.3 UNDERVOLT_FET1.2 UNDERVOLT_FET1.4
N$73: IC13.7 UNDER_WARN2.2
N$74: IC13.5 UNDER_CRIT2.2
N$75: IC13.9 IC13.11 TEMP_TRIM2.2
N$76: R61.1 UNDER_CRIT2.3
N$77: R62.1 UNDER_WARN2.3
N$78: IC13.4 IC13.6 UNDER_TRIM2.2
N$79: R66.1 UNDER_TRIM2.3
N$80: R65.1 TEMP_TRIM2.3
N$81: R67.1 UNDERVOLT2.A
N$82: R68.1 UNDERVOLT_WARN2.A
N$83: OVERTEMP5.A R69.1
N$84: OVERTEMP6.A R70.1
N$85: IC13.8 R63.1
N$86: IC13.10 R64.1
N$87: CURRENT_TRIM2.2 IC15.9
N$88: OVER_WARN2.3 R78.1
N$89: IC15.5 IC15.7 OVER_TRIM2.2
N$90: OVER_TRIM2.3 R81.1
N$91: CURRENT_TRIM2.3 R80.1
N$92: OVERVOLT2.A R82.1
N$93: OVERVOLT_WARN2.A R83.1
N$94: OVERCURRENT2.A R84.1
N$95: IC15.6 OVER_WARN2.2
N$96: IC15.4 OVER_CRIT2.2
N$97: OVER_CRIT2.3 R77.1
N$98: IC15.8 R79.1
N$99: K3.1 R72.1
N$100: K3.2 OVERCURRENT_FET2.2 OVERCURRENT_FET2.4
N$101: OVERCURRENT_FET2.3 OVERTEMP2_FET2.2 OVERTEMP2_FET2.4
N$102: OVERTEMP1_FET2.2 OVERTEMP1_FET2.4 OVERTEMP2_FET2.3
N$103: OVERTEMP1_FET2.3 OVERVOLT_FET2.2 OVERVOLT_FET2.4
N$104: OVERVOLT_FET2.3 UNDERVOLT_FET2.2 UNDERVOLT_FET2.4
N$105: IC16.7 UNDER_WARN3.2
N$106: IC16.5 UNDER_CRIT3.2
N$107: IC16.9 IC16.11 TEMP_TRIM3.2
N$108: R85.1 UNDER_CRIT3.3
N$109: R86.1 UNDER_WARN3.3
N$110: IC16.4 IC16.6 UNDER_TRIM3.2
N$111: R90.1 UNDER_TRIM3.3
N$112: R89.1 TEMP_TRIM3.3
N$113: R91.1 UNDERVOLT3.A
N$114: R92.1 UNDERVOLT_WARN3.A
N$115: OVERTEMP7.A R93.1
N$116: OVERTEMP8.A R94.1
N$117: IC16.8 R87.1
N$118: IC16.10 R88.1
N$119: CURRENT_TRIM3.2 IC18.9
N$120: OVER_WARN3.3 R102.1
N$121: IC18.5 IC18.7 OVER_TRIM3.2
N$122: OVER_TRIM3.3 R105.1
N$123: CURRENT_TRIM3.3 R104.1
N$124: OVERVOLT3.A R106.1
N$125: OVERVOLT_WARN3.A R107.1
N$126: OVERCURRENT3.A R108.1
N$127: IC18.6 OVER_WARN3.2
N$128: IC18.4 OVER_CRIT3.2
N$129: OVER_CRIT3.3 R101.1
N$130: IC18.8 R103.1
N$131: K4.1 R96.1
N$132: K4.2 OVERCURRENT_FET3.2 OVERCURRENT_FET3.4
N$133: OVERCURRENT_FET3.3 OVERTEMP2_FET3.2 OVERTEMP2_FET3.4
N$134: OVERTEMP1_FET3.2 OVERTEMP1_FET3.4 OVERTEMP2_FET3.3
N$135: OVERTEMP1_FET3.3 OVERVOLT_FET3.2 OVERVOLT_FET3.4
N$136: OVERVOLT_FET3.3 UNDERVOLT_FET3.2 UNDERVOLT_FET3.4
OVERCURRENT_CRITICAL: IC9.14 OVERCURRENT.C OVERCURRENT_FET.1 R28.1
OVERCURRENT_CRITICAL1: IC12.14 OVERCURRENT1.C OVERCURRENT_FET1.1 R52.1
OVERCURRENT_CRITICAL2: IC15.14 OVERCURRENT2.C OVERCURRENT_FET2.1 R76.1
OVERCURRENT_CRITICAL3: IC18.14 OVERCURRENT3.C OVERCURRENT_FET3.1 R100.1
OVERTEMP_CRITICAL1: IC7.14 OVERTEMP1.C OVERTEMP1_FET.1 R26.1
OVERTEMP_CRITICAL2: IC7.13 OVERTEMP2.C OVERTEMP2_FET.1 R27.1
OVERTEMP_CRITICAL3: IC10.14 OVERTEMP1_FET1.1 OVERTEMP3.C R50.1
OVERTEMP_CRITICAL4: IC10.13 OVERTEMP2_FET1.1 OVERTEMP4.C R51.1
OVERTEMP_CRITICAL5: IC13.14 OVERTEMP1_FET2.1 OVERTEMP5.C R74.1
OVERTEMP_CRITICAL6: IC13.13 OVERTEMP2_FET2.1 OVERTEMP6.C R75.1
OVERTEMP_CRITICAL7: IC16.14 OVERTEMP1_FET3.1 OVERTEMP7.C R98.1
OVERTEMP_CRITICAL8: IC16.13 OVERTEMP2_FET3.1 OVERTEMP8.C R99.1
OVERVOLT_CRITICAL: IC9.2 OVERVOLT.C OVERVOLT_FET.1 R25.1
OVERVOLT_CRITICAL1: IC12.2 OVERVOLT1.C OVERVOLT_FET1.1 R49.1
OVERVOLT_CRITICAL2: IC15.2 OVERVOLT2.C OVERVOLT_FET2.1 R73.1
OVERVOLT_CRITICAL3: IC18.2 OVERVOLT3.C OVERVOLT_FET3.1 R97.1
OVERVOLT_WARNING1: IC9.1 OVERVOLT_WARN.C
OVERVOLT_WARNING2: IC12.1 OVERVOLT_WARN1.C
OVERVOLT_WARNING3: IC15.1 OVERVOLT_WARN2.C
OVERVOLT_WARNING4: IC18.1 OVERVOLT_WARN3.C
TEMP1: R15.2 SV9.1
TEMP2: R16.2 SV9.4
TEMP3: R39.2 SV10.1
TEMP4: R40.2 SV10.4
TEMP5: R63.2 SV11.1
TEMP6: R64.2 SV11.4
TEMP7: R87.2 SV12.1
TEMP8: R88.2 SV12.4
TS7800_+ [power]: TS7800_CON.1 U$2.5 V7805_C6.1
TS7800_+1 [power]: TS7800_CON1.1 U$1.5 V7805_C3.1
TS7800_EN [power]: S1.13 U$2.1 V7805_C5.1
TS7800_EN1 [power]: S2.13 U$1.1 V7805_C2.1
UNDERVOLT_CRITICAL: IC7.2 R23.1 UNDERVOLT.C UNDERVOLT_FET.1
UNDERVOLT_CRITICAL1: IC10.2 R47.1 UNDERVOLT1.C UNDERVOLT_FET1.1
UNDERVOLT_CRITICAL2: IC13.2 R71.1 UNDERVOLT2.C UNDERVOLT_FET2.1
UNDERVOLT_CRITICAL3: IC16.2 R95.1 UNDERVOLT3.C UNDERVOLT_FET3.1
UNDERVOLT_WARNING: IC7.1 UNDERVOLT_WARN.C
UNDERVOLT_WARNING1: IC10.1 UNDERVOLT_WARN1.C
UNDERVOLT_WARNING2: IC13.1 UNDERVOLT_WARN2.C
UNDERVOLT_WARNING3: IC16.1 UNDERVOLT_WARN3.C
VREF: 3V7.2 6103CAP14.1 R17.2 R18.2 R32.2 R33.2
VREF1: 3V3.2 6103CAP8.1 SV3.2 SV3.4 SV3.6 SV3.8 SV3.10 SV3.12 SV3.14 SV3.16 SV3.18 SV3.20
VREF1_EN: 3V3.1 6103CAP7.1 S1.16
VREF1_EN1: 3V1.1 6103CAP1.1 S2.16
VREF2: 3V4.2 6103CAP10.1 SV2.2 SV2.4 SV2.6 SV2.8 SV2.10 SV2.12 SV2.14 SV2.16 SV2.18 SV2.20
VREF2_EN: 3V4.1 6103CAP9.1 S1.15
VREF2_EN1: 3V2.1 6103CAP3.1 S2.15
VREF3: 3V5.2 6103CAP12.1 SV4.2 SV4.4 SV4.6 SV4.8 SV4.10 SV4.12 SV4.14 SV4.16 SV4.18 SV4.20
VREF3_EN: 3V5.1 6103CAP11.1 S1.14
VREF3_EN1: 3V6.1 6103CAP5.1 S2.14
VREF4: 3V1.2 6103CAP2.1 SV7.2 SV7.4 SV7.6 SV7.8 SV7.10 SV7.12 SV7.14 SV7.16 SV7.18 SV7.20
VREF5: 3V2.2 6103CAP4.1 SV6.2 SV6.4 SV6.6 SV6.8 SV6.10 SV6.12 SV6.14 SV6.16 SV6.18 SV6.20
VREF6: 3V6.2 6103CAP6.1 SV8.2 SV8.4 SV8.6 SV8.8 SV8.10 SV8.12 SV8.14 SV8.16 SV8.18 SV8.20
VREF7: 3V8.2 6103CAP16.1 R41.2 R42.2 R56.2 R57.2
VREF8: 3V9.2 6103CAP18.1 R65.2 R66.2 R80.2 R81.2
VREF9: 3V10.2 6103CAP20.1 R89.2 R90.2 R104.2 R105.2

## Tracks (layer width: path | path; a pad name or v marks a point on that pad's centre or on a via)
3.3V1
  Bottom 0.406: 317CAP8.1 7.11,25.4 4.45,22.73 R7.1 4.32,22.61 4.32,21.46 3.05,20.19 3.05,18.16 3.3,17.91 6.6,17.91 10.79,22.1 11.3,22.1 IC4.4 11.43,22.23 11.56,22.35 28.96,22.35 30.99,20.32 SV1.6
3.3V1_EN  (via drill 0.61)
  Top 0.406: 13.34,40.13 v13.34,48.64 | 13.34,40.13 7.49,34.29 v7.49,16.38 | v47.5,34.29 50.8,30.99 50.8,26.29 54.99,22.1 54.99,9.78 53.21,8 45.34,8 41.27,3.94 41.27,2.67 S1.19 | v20.45,34.29 19.18,34.29 13.34,40.13
  Bottom 0.406: v13.34,48.64 15.62,50.93 15.62,56.52 317CAP3.1 | v7.49,16.38 8.64,16.38 9.02,16 IC4.3 | v20.45,34.29 v47.5,34.29
3.3V1_EN1  (via drill 0.61)
  Top 0.406: 13.34,118.87 v13.34,127.38 | 13.34,118.87 7.49,113.03 v7.49,95.12 | v47.5,113.03 50.8,109.73 50.8,105.03 54.99,100.84 54.99,88.52 53.21,86.74 45.34,86.74 41.27,82.68 41.27,81.41 S2.19 | v20.45,113.03 19.18,113.03 13.34,118.87
  Bottom 0.406: v13.34,127.38 15.62,129.67 15.62,135.25 317CAP1.1 | v7.49,95.12 8.64,95.12 9.02,94.74 IC1.3 | v20.45,113.03 v47.5,113.03
3.3V2  (via drill 0.61)
  Top 0.406: v6.48,53.21 v9.27,50.42
  Bottom 0.406: 317CAP10.1 7.75,56.52 5.46,54.23 | 5.46,54.23 4.45,53.21 R9.1 4.32,53.09 1.52,50.29 1.52,16.89 4.06,14.35 16.76,14.35 20.45,18.03 20.45,19.3 22.73,21.59 27.18,21.59 28.45,20.32 SV1.4 | v9.27,50.42 11.43,52.58 IC5.4 | 5.46,54.23 v6.48,53.21
3.3V2_EN  (via drill 0.61)
  Top 0.406: v39.88,4.7 38.73,3.56 38.73,2.67 S1.18 | v24.26,2.92 24.26,3.3 12.57,14.99 v12.57,30.1
  Bottom 0.406: 14.86,43.18 13.97,43.18 12.57,41.78 10.54,41.78 10.03,42.29 10.03,45.47 9.14,46.35 IC5.3 | 14.86,43.18 317CAP9.1 | v39.88,4.7 39.5,4.7 37.72,2.92 v24.26,2.92 | v12.57,30.1 14.86,32.38 14.86,43.18
3.3V2_EN1  (via drill 0.61)
  Top 0.406: v39.88,83.44 38.73,82.3 38.73,81.41 S2.18 | v24.26,81.66 24.26,82.04 12.57,93.73 v12.57,108.84
  Bottom 0.406: 14.86,121.92 13.97,121.92 12.57,120.52 10.54,120.52 10.03,121.03 10.03,124.21 9.14,125.09 IC2.3 | 14.86,121.92 317CAP4.1 | v39.88,83.44 39.5,83.44 37.72,81.66 v24.26,81.66 | v12.57,108.84 14.86,111.12 14.86,121.92
3.3V3  (via drill 0.61)
  Top 0.406: v22.86,20.32 22.86,28.45 v13.59,37.72
  Bottom 0.406: 317CAP12.1 8.76,42.55 11.43,39.88 IC6.4 | R11.1 4.45,39.88 11.18,39.88 IC6.4 | v22.86,20.32 SV1.2 | v13.59,37.72 11.56,39.75 IC6.4
3.3V3_EN  (via drill 0.61)
  Top 0.406: v10.41,35.81 10.41,33.53 | 10.41,33.53 v10.41,30.61 | v34.92,4.95 36.07,3.81 36.07,2.67 S1.17 | v24.51,4.95 24.51,5.84 14.61,15.75 14.61,29.46 10.54,33.53 10.41,33.53
  Bottom 0.406: v10.41,30.61 15.62,25.4 317CAP11.1 | v10.41,35.81 10.41,35.18 9.02,33.78 IC6.3 | v24.51,4.95 v34.92,4.95
3.3V3_EN1  (via drill 0.61)
  Top 0.406: v10.41,114.55 10.41,112.27 | 10.41,112.27 v10.41,109.35 | v34.92,83.69 36.07,82.55 36.07,81.41 S2.17 | v24.51,83.69 24.51,84.58 14.61,94.49 14.61,108.2 10.54,112.27 10.41,112.27
  Bottom 0.406: v10.41,109.35 15.62,104.14 317CAP6.1 | v10.41,114.55 10.41,113.92 9.02,112.52 IC3.3 | v24.51,83.69 v34.92,83.69
3.3V4  (via drill 0.61)
  Top 0.406: v22.86,99.06 22.86,107.19 v13.59,116.46
  Bottom 0.406: 317CAP7.1 8.76,121.28 11.43,118.62 IC3.4 | R5.1 4.45,118.62 11.18,118.62 IC3.4 | v22.86,99.06 SV5.2 | v13.59,116.46 11.56,118.49 IC3.4
3.3V5
  Bottom 0.406: 317CAP2.1 7.11,104.14 4.45,101.47 R1.1 4.32,101.35 4.32,100.2 3.05,98.93 3.05,96.9 3.3,96.65 6.6,96.65 10.79,100.84 11.3,100.84 IC1.4 11.43,100.97 11.56,101.09 28.96,101.09 30.99,99.06 SV5.6
3.3V6  (via drill 0.61)
  Top 0.406: v6.48,131.95 v9.27,129.16
  Bottom 0.406: 317CAP5.1 7.75,135.25 5.46,132.97 | 5.46,132.97 4.45,131.95 R3.1 4.32,131.83 1.52,129.03 1.52,95.63 4.06,93.09 16.76,93.09 20.45,96.77 20.45,98.04 22.73,100.33 27.18,100.33 28.45,99.06 SV5.4 | v9.27,129.16 11.43,131.32 IC2.4 | 5.46,132.97 v6.48,131.95
5V  (via drill 0.61)
  Top 0.406: SV9.8 SV9.5 115.62,85.04 113.89,85.04 112.57,86.36 SV9.2 v108.84,89.28 | IC8.2 91.16,138.15 91.16,137.29 95.1,133.35 7805CAP2.1 94.54,134.19 96.65,136.3 96.65,138.25 96.93,138.53 99.97,138.53 101.27,137.24 6103CAP13.1 102.87,138.56 v102.87,138.91 | v106.96,134.82 109.35,134.82 | 109.35,134.82 111.96,134.82 113.33,136.19 116.66,136.19 3V7.1 | v102.74,96.01 102.74,97.41 101.85,98.3 101.85,122.05 109.35,129.54 109.35,134.82
  Bottom 0.406: v102.87,138.91 v106.96,134.82 | v108.84,89.28 108.84,89.92 v102.74,96.01
5V1
  Bottom 0.406: 55.37,40.64 45.72,30.99 45.72,26.67 SV1.12 | 55.37,40.64 58.17,43.43 63.75,43.43 PWR_1.2 | 55.37,40.64 48.26,47.75 48.26,48.77 49.02,49.53 50.04,49.53 54.86,54.36 68.96,54.36 70.87,52.45 70.87,52.07 C2.1
5V1_EN  (via drill 0.61)
  Top 0.406: v66.93,42.04 55.75,30.86 55.75,9.53 48.9,2.67 S1.22
  Bottom 0.406: C1.1 70.87,44.45 69.98,43.56 68.33,43.56 PWR_1.1 68.2,43.31 v66.93,42.04
5V1_EN1  (via drill 0.61)
  Top 0.406: v66.93,120.78 55.75,109.6 55.75,88.27 48.9,81.41 S2.22
  Bottom 0.406: C7.1 70.87,123.19 69.98,122.3 68.33,122.3 PWR_4.1 68.2,122.05 v66.93,120.78
5V2
  Bottom 0.406: C4.1 70.87,38.1 70.87,38.48 68.96,40.39 63.12,40.39 62.87,40.13 62.87,33.4 63.75,32.51 63.75,29.59 PWR_2.2 63.63,29.34 60.83,26.54 48.9,26.54 43.18,20.83 43.18,19.81 42.42,19.05 38.86,19.05 37.59,20.32 SV1.10
5V2_EN  (via drill 0.61)
  Top 0.406: v72.14,28.57 71.63,28.07 v69.72,28.07 69.6,27.94 69.6,20.32 55.5,6.22 v55.5,2.41 | v47.62,4.7 46.35,3.43 46.35,2.67 S1.21
  Bottom 0.406: v69.72,28.07 68.33,29.46 PWR_2.1 | v72.14,28.57 72.14,28.83 C3.1 | v47.62,4.7 48.13,4.7 50.42,2.41 v55.5,2.41
5V2_EN1  (via drill 0.61)
  Top 0.406: v72.14,107.31 71.63,106.81 v69.72,106.81 69.6,106.68 69.6,99.06 55.5,84.96 v55.5,81.15 | v47.62,83.44 46.35,82.17 46.35,81.41 S2.21
  Bottom 0.406: v69.72,106.81 68.33,108.2 PWR_5.1 | v72.14,107.31 72.14,107.57 C9.1 | v47.62,83.44 48.13,83.44 50.42,81.15 v55.5,81.15
5V3  (via drill 0.61)
  Top 0.406: SV1.8 35.05,20.32 37.08,22.35 53.34,22.35 v53.98,21.72
  Bottom 0.406: 65.53,15.75 70.87,21.08 70.87,24.13 C6.1 | 65.53,15.75 65.41,15.62 63.88,15.62 PWR_3.2 | v53.98,21.72 59.56,21.72 65.53,15.75
5V3_EN  (via drill 0.61)
  Top 0.406: v43.81,5.08 43.81,2.67 S1.20
  Bottom 0.406: C5.1 70.87,16.51 69.98,15.62 68.33,15.62 PWR_3.1 68.2,15.37 56.26,3.43 50.42,3.43 48.13,5.71 48.13,6.22 46.86,7.49 44.58,7.49 43.81,6.73 v43.81,5.08
5V3_EN1  (via drill 0.61)
  Top 0.406: v43.81,83.82 43.81,81.41 S2.20
  Bottom 0.406: C12.1 70.87,95.25 69.98,94.36 68.33,94.36 PWR_6.1 68.2,94.11 56.26,82.17 50.42,82.17 48.13,84.45 48.13,84.96 46.86,86.23 44.58,86.23 43.81,85.47 v43.81,83.82
5V4  (via drill 0.61)
  Top 0.406: SV5.8 35.05,99.06 37.08,101.09 53.34,101.09 v53.98,100.46
  Bottom 0.406: 65.53,94.49 70.87,99.82 70.87,102.87 C11.1 | 65.53,94.49 65.41,94.36 63.88,94.36 PWR_6.2 | v53.98,100.46 59.56,100.46 65.53,94.49
5V5
  Bottom 0.406: C10.1 70.87,116.84 70.87,117.22 68.96,119.13 63.12,119.13 62.87,118.87 62.87,112.14 63.75,111.25 63.75,108.33 PWR_5.2 63.63,108.08 60.83,105.28 48.9,105.28 43.18,99.57 43.18,98.55 42.42,97.79 38.86,97.79 37.59,99.06 SV5.10
5V6
  Bottom 0.406: 55.37,119.38 45.72,109.73 45.72,105.41 SV5.12 | 55.37,119.38 58.17,122.17 63.75,122.17 PWR_4.2 | 55.37,119.38 48.26,126.49 48.26,127.51 49.02,128.27 50.04,128.27 54.86,133.1 68.96,133.1 70.87,131.19 70.87,130.81 C8.1
5V7  (via drill 0.61)
  Top 0.406: SV10.8 SV10.5 115.62,6.3 113.89,6.3 112.57,7.62 SV10.2 v108.84,10.54 | IC11.2 91.16,59.41 91.16,58.55 95.1,54.61 7805CAP3.1 94.54,55.45 96.65,57.56 96.65,59.51 96.93,59.79 99.97,59.79 101.27,58.5 6103CAP15.1 102.87,59.82 v102.87,60.17 | v106.96,56.08 109.35,56.08 | 109.35,56.08 111.96,56.08 113.33,57.45 116.66,57.45 3V8.1 | v102.74,17.27 102.74,18.67 101.85,19.56 101.85,43.31 109.35,50.8 109.35,56.08
  Bottom 0.406: v102.87,60.17 v106.96,56.08 | v108.84,10.54 108.84,11.18 v102.74,17.27
5V8  (via drill 0.61)
  Top 0.406: SV11.8 SV11.5 194.36,85.04 192.63,85.04 191.31,86.36 SV11.2 v187.58,89.28 | IC14.2 169.9,138.15 169.9,137.29 173.84,133.35 7805CAP5.1 173.28,134.19 175.39,136.3 175.39,138.25 175.67,138.53 178.71,138.53 180.01,137.24 6103CAP17.1 181.61,138.56 v181.61,138.91 | v185.7,134.82 188.09,134.82 | 188.09,134.82 190.7,134.82 192.07,136.19 195.4,136.19 3V9.1 | v181.48,96.01 181.48,97.41 180.59,98.3 180.59,122.05 188.09,129.54 188.09,134.82
  Bottom 0.406: v181.61,138.91 v185.7,134.82 | v187.58,89.28 187.58,89.92 v181.48,96.01
5V9  (via drill 0.61)
  Top 0.406: SV12.8 SV12.5 194.36,6.3 192.63,6.3 191.31,7.62 SV12.2 v187.58,10.54 | IC17.2 169.9,59.41 169.9,58.55 173.84,54.61 7805CAP7.1 173.28,55.45 175.39,57.56 175.39,59.51 175.67,59.79 178.71,59.79 180.01,58.5 6103CAP19.1 181.61,59.82 v181.61,60.17 | v185.7,56.08 188.09,56.08 | 188.09,56.08 190.7,56.08 192.07,57.45 195.4,57.45 3V10.1 | v181.48,17.27 181.48,18.67 180.59,19.56 180.59,43.31 188.09,50.8 188.09,56.08
  Bottom 0.406: v181.61,60.17 v185.7,56.08 | v187.58,10.54 187.58,11.18 v181.48,17.27
12V
  Top 1.27: SV1.18 SV1.20 49.91,19.81 51.18,18.54 51.18,14.99 51.31,14.86 51.31,11.94 S1.2 | S1.12 26.04,11.3 28.45,11.3 S1.11 29.08,11.3 30.99,11.3 S1.10 31.62,11.3 33.53,11.3 S1.9 34.16,11.3 36.07,11.3 S1.8 36.7,11.3 38.61,11.3 S1.7 39.24,11.3 41.15,11.3 S1.6 41.78,11.3 43.69,11.3 S1.5 44.32,11.3 46.23,11.3 S1.4 46.86,11.3 48.77,11.3 S1.3 49.4,11.3 51.31,11.3 S1.2 | S1.1 53.85,11.3 51.94,11.3 S1.2
12V1
  Top 1.27: SV5.18 SV5.20 49.91,98.55 51.18,97.28 51.18,93.73 51.31,93.6 51.31,90.68 S2.2 | S2.12 26.04,90.04 28.45,90.04 S2.11 29.08,90.04 30.99,90.04 S2.10 31.62,90.04 33.53,90.04 S2.9 34.16,90.04 36.07,90.04 S2.8 36.7,90.04 38.61,90.04 S2.7 39.24,90.04 41.15,90.04 S2.6 41.78,90.04 43.69,90.04 S2.5 44.32,90.04 46.23,90.04 S2.4 46.86,90.04 48.77,90.04 S2.3 49.4,90.04 51.31,90.04 S2.2 | S2.1 53.85,90.04 51.94,90.04 S2.2
12V1_EN  (via drill 0.61)
  Top 0.406: v56.77,24.38 61.09,20.07 61.09,12.83 53.98,5.71 53.98,2.67 S1.24
  Bottom 0.406: v56.77,24.38 55.5,24.38 54.23,25.65 49.78,25.65 SV1.16
12V1_EN1  (via drill 0.61)
  Top 0.406: v56.77,103.12 61.09,98.81 61.09,91.57 53.98,84.45 53.98,81.41 S2.24
  Bottom 0.406: v56.77,103.12 55.5,103.12 54.23,104.39 49.78,104.39 SV5.16
12V2
  Top 0.406: 91.16,130.63 91.16,126.64 POWER.2 93.47,124.33 93.47,120.02 101.09,112.39 101.09,95.89 104.14,92.84 R27.2 106.43,92.71 107.82,91.31 110.49,91.31 110.62,91.44 | 91.16,130.63 IC8.1 91.11,133.81 91.11,136.27 89.89,137.49 89.89,138.86 91.75,140.72 93.8,140.72 R21.2 | 91.16,130.63 97.56,130.63 99.77,132.84 100.97,132.84 R24.2 | 123.85,129.54 124.94,128.45 124.94,127.08 123.98,126.11 123.98,118.16 122.66,116.84 IC9.3 121.03,116.84 119.63,115.44 119.63,111 123.95,106.68 R25.2 | IC7.3 123.85,129.54 | 95.1,139.7 95.1,137.16 7805CAP1.1 | R21.2 95.1,139.7 | R21.2 | R22.2 96.29,140.82 95.28,139.8 95.1,139.7 | R22.2 | R36.2 99.24,140.82 R22.2 | R36.2 | R34.2 104.32,140.82 R36.2 | R34.2 | R19.2 109.4,140.82 R34.2 | R19.2 | R35.2 114.48,140.82 R19.2 | R35.2 | R20.2 119.56,140.82 R35.2 | R20.2 | 123.85,129.54 123.95,129.72 123.95,137.59 124.05,137.69 124.05,140.64 R20.2 | 110.62,91.44 111.89,92.71 R26.2 | R23.2 119.13,92.71 117.86,91.44 | 117.86,91.44 117.73,91.31 110.74,91.31 110.62,91.44 | R28.2 141.99,92.71 140.59,91.31 117.98,91.31 117.86,91.44
12V2_EN  (via drill 0.61)
  Top 0.406: v56.77,14.86 56.77,9.53 51.44,4.19 51.44,2.67 S1.23 | v52.58,19.05 50.04,21.59 43.18,21.59 SV1.14
  Bottom 0.406: v52.58,19.05 v56.77,14.86
12V2_EN1  (via drill 0.61)
  Top 0.406: v56.77,93.6 56.77,88.27 51.44,82.93 51.44,81.41 S2.23 | v52.58,97.79 50.04,100.33 43.18,100.33 SV5.14
  Bottom 0.406: v52.58,97.79 v56.77,93.6
12V3
  Top 0.406: 91.16,51.89 91.16,47.9 POWER1.2 93.47,45.59 93.47,41.27 101.09,33.66 101.09,17.14 104.14,14.1 R51.2 106.43,13.97 107.82,12.57 110.49,12.57 110.62,12.7 | 91.16,51.89 IC11.1 91.11,55.07 91.11,57.53 89.89,58.75 89.89,60.12 91.75,61.98 93.8,61.98 R45.2 | 91.16,51.89 97.56,51.89 99.77,54.1 100.97,54.1 R48.2 | 123.85,50.8 124.94,49.71 124.94,48.34 123.98,47.37 123.98,39.42 122.66,38.1 IC12.3 121.03,38.1 119.63,36.7 119.63,32.26 123.95,27.94 R49.2 | IC10.3 123.85,50.8 | 95.1,60.96 95.1,58.42 7805CAP4.1 | R45.2 95.1,60.96 | R45.2 | R46.2 96.29,62.08 95.28,61.06 95.1,60.96 | R46.2 | R60.2 99.24,62.08 R46.2 | R60.2 | R58.2 104.32,62.08 R60.2 | R58.2 | R43.2 109.4,62.08 R58.2 | R43.2 | R59.2 114.48,62.08 R43.2 | R59.2 | R44.2 119.56,62.08 R59.2 | R44.2 | 123.85,50.8 123.95,50.98 123.95,58.85 124.05,58.95 124.05,61.9 R44.2 | 110.62,12.7 111.89,13.97 R50.2 | R47.2 119.13,13.97 117.86,12.7 | 117.86,12.7 117.73,12.57 110.74,12.57 110.62,12.7 | R52.2 141.99,13.97 140.59,12.57 117.98,12.57 117.86,12.7
12V4
  Top 0.406: 169.9,130.63 169.9,126.64 POWER2.2 172.21,124.33 172.21,120.02 179.83,112.39 179.83,95.89 182.88,92.84 R75.2 185.17,92.71 186.56,91.31 189.23,91.31 189.36,91.44 | 169.9,130.63 IC14.1 169.85,133.81 169.85,136.27 168.63,137.49 168.63,138.86 170.49,140.72 172.54,140.72 R69.2 | 169.9,130.63 176.3,130.63 178.51,132.84 179.71,132.84 R72.2 | 202.59,129.54 203.68,128.45 203.68,127.08 202.72,126.11 202.72,118.16 201.4,116.84 IC15.3 199.77,116.84 198.37,115.44 198.37,111 202.69,106.68 R73.2 | IC13.3 202.59,129.54 | 173.84,139.7 173.84,137.16 7805CAP6.1 | R69.2 173.84,139.7 | R69.2 | R70.2 175.03,140.82 174.01,139.8 173.84,139.7 | R70.2 | R84.2 177.98,140.82 R70.2 | R84.2 | R82.2 183.06,140.82 R84.2 | R82.2 | R67.2 188.14,140.82 R82.2 | R67.2 | R83.2 193.22,140.82 R67.2 | R83.2 | R68.2 198.3,140.82 R83.2 | R68.2 | 202.59,129.54 202.69,129.72 202.69,137.59 202.79,137.69 202.79,140.64 R68.2 | 189.36,91.44 190.63,92.71 R74.2 | R71.2 197.87,92.71 196.6,91.44 | 196.6,91.44 196.47,91.31 189.48,91.31 189.36,91.44 | R76.2 220.73,92.71 219.33,91.31 196.72,91.31 196.6,91.44
12V5
  Top 0.406: 169.9,51.89 169.9,47.9 POWER3.2 172.21,45.59 172.21,41.27 179.83,33.66 179.83,17.14 182.88,14.1 R99.2 185.17,13.97 186.56,12.57 189.23,12.57 189.36,12.7 | 169.9,51.89 IC17.1 169.85,55.07 169.85,57.53 168.63,58.75 168.63,60.12 170.49,61.98 172.54,61.98 R93.2 | 169.9,51.89 176.3,51.89 178.51,54.1 179.71,54.1 R96.2 | 202.59,50.8 203.68,49.71 203.68,48.34 202.72,47.37 202.72,39.42 201.4,38.1 IC18.3 199.77,38.1 198.37,36.7 198.37,32.26 202.69,27.94 R97.2 | IC16.3 202.59,50.8 | 173.84,60.96 173.84,58.42 7805CAP8.1 | R93.2 173.84,60.96 | R93.2 | R94.2 175.03,62.08 174.01,61.06 173.84,60.96 | R94.2 | R108.2 177.98,62.08 R94.2 | R108.2 | R106.2 183.06,62.08 R108.2 | R106.2 | R91.2 188.14,62.08 R106.2 | R91.2 | R107.2 193.22,62.08 R91.2 | R107.2 | R92.2 198.3,62.08 R107.2 | R92.2 | 202.59,50.8 202.69,50.98 202.69,58.85 202.79,58.95 202.79,61.9 R92.2 | 189.36,12.7 190.63,13.97 R98.2 | R95.2 197.87,13.97 196.6,12.7 | 196.6,12.7 196.47,12.57 189.48,12.57 189.36,12.7 | R100.2 220.73,13.97 219.33,12.57 196.72,12.57 196.6,12.7
96V  (via drill 0.61)
  Top 0.406: R14.2 150.16,95.1 | 150.16,95.1 R29.2 | R29.2 | R14.2 | R30.2 150.16,100.18 | 150.16,100.18 R13.2 | R13.2 | R30.2 | 150.16,100.18 150.16,95.1 | v144.58,100.18 148.41,100.18 R13.2
  Bottom 0.406: v144.58,100.18 133.1,100.18 119.46,113.82 95.4,113.82 VOLT.2
96V1  (via drill 0.61)
  Top 0.406: R38.2 150.16,16.36 | 150.16,16.36 R53.2 | R53.2 | R38.2 | R54.2 150.16,21.44 | 150.16,21.44 R37.2 | R37.2 | R54.2 | 150.16,21.44 150.16,16.36 | v144.58,21.44 148.41,21.44 R37.2
  Bottom 0.406: v144.58,21.44 133.1,21.44 119.46,35.08 95.4,35.08 VOLT1.2
96V2  (via drill 0.61)
  Top 0.406: R62.2 228.91,95.1 | 228.91,95.1 R77.2 | R77.2 | R62.2 | R78.2 228.91,100.18 | 228.91,100.18 R61.2 | R61.2 | R78.2 | 228.91,100.18 228.91,95.1 | v223.32,100.18 227.15,100.18 R61.2
  Bottom 0.406: v223.32,100.18 211.84,100.18 198.2,113.82 174.14,113.82 VOLT2.2
96V3  (via drill 0.61)
  Top 0.406: R86.2 228.91,16.36 | 228.91,16.36 R101.2 | R101.2 | R86.2 | R102.2 228.91,21.44 | 228.91,21.44 R85.2 | R85.2 | R102.2 | 228.91,21.44 228.91,16.36 | v223.32,21.44 227.15,21.44 R85.2
  Bottom 0.406: v223.32,21.44 211.84,21.44 198.2,35.08 174.14,35.08 VOLT3.2
CONTACTOR_IN
  Bottom 2.54: CONTACTOR.2 98.78,99.06 K1.S
CONTACTOR_IN1
  Bottom 2.54: CONTACTOR1.2 98.78,20.32 K2.S
CONTACTOR_IN2
  Bottom 2.54: CONTACTOR2.2 177.52,99.06 K3.S
CONTACTOR_IN3
  Bottom 2.54: CONTACTOR3.2 177.52,20.32 K4.S
CONTACTOR_OUT
  Bottom 2.54: CONTACTOR.1 87.63,99.06 92.71,104.14 98.86,104.14 K1.P
CONTACTOR_OUT1
  Bottom 2.54: CONTACTOR1.1 87.63,20.32 92.71,25.4 98.86,25.4 K2.P
CONTACTOR_OUT2
  Bottom 2.54: CONTACTOR2.1 166.37,99.06 171.45,104.14 177.6,104.14 K3.P
CONTACTOR_OUT3
  Bottom 2.54: CONTACTOR3.1 166.37,20.32 171.45,25.4 177.6,25.4 K4.P
CURRENT  (via drill 0.61)
  Top 0.406: R31.2 136.4,92.71 v136.65,92.46
  Bottom 0.406: v136.65,92.46 131.19,92.46 123.83,85.09 120.65,85.09 SV9.7
CURRENT1  (via drill 0.61)
  Top 0.406: R55.2 136.4,13.97 v136.65,13.72
  Bottom 0.406: v136.65,13.72 131.19,13.72 123.83,6.35 120.65,6.35 SV10.7
CURRENT2  (via drill 0.61)
  Top 0.406: R79.2 215.14,92.71 v215.39,92.46
  Bottom 0.406: v215.39,92.46 209.93,92.46 202.56,85.09 199.39,85.09 SV11.7
CURRENT3  (via drill 0.61)
  Top 0.406: R103.2 215.14,13.97 v215.39,13.72
  Bottom 0.406: v215.39,13.72 209.93,13.72 202.56,6.35 199.39,6.35 SV12.7
GND
  pour Top: 1.27,74.93 74.93,74.93 74.93,1.27 1.27,1.27
  pour Bottom: 1.27,74.93 74.93,74.93 74.93,1.27 1.27,1.27
GND1
  pour Top: 1.27,153.67 74.93,153.67 74.93,80.01 1.27,80.01
  pour Bottom: 1.27,153.67 74.93,153.67 74.93,80.01 1.27,80.01
GND2  (via drill 0.61)
  Top 0.406: 6103CAP14.2 112.75,137.16 | 112.75,137.16 3V7.3 | UNDER_WARN.1 147.32,106.98 OVER_WARN.1 147.32,116.05 UNDER_CRIT.1 147.32,124.94 147.32,133.63 OVER_CRIT.1 | 134.59,124.74 UNDER_TRIM.1 | 134.59,116.15 TEMP_TRIM.1 134.62,115.67 134.62,107.16 CURRENT_TRIM.1 | 124.92,130.89 v124.92,131.72 | 126.19,129.62 126.87,129.62 IC7.12 | v112.75,136.98 112.75,137.16
  Bottom 0.406: 122.07,83.95 SV9.9 | v112.75,136.98 117.83,136.98 123.09,131.72 v124.92,131.72
  other vias: 116.84,129.54 114.3,119.38 119.38,106.68 143.51,106.68 142.24,138.43 127.64,140.34 93.98,118.11 124.46,90.17 144.78,114.3 143.51,120.65 105.41,127 137.79,96.52 128.27,137.16
  pour Top: 80.01,153.67 80.01,80.01 153.67,80.01 153.67,153.67
  pour Bottom: 80.01,153.67 153.67,153.67 153.67,80.01 80.01,80.01
GND3  (via drill 0.61)
  Top 0.406: 6103CAP16.2 112.75,58.42 | 112.75,58.42 3V8.3 | UNDER_WARN1.1 147.32,28.25 OVER_WARN1.1 147.32,37.31 UNDER_CRIT1.1 147.32,46.2 OVER_CRIT1.1 | 134.59,46 UNDER_TRIM1.1 | 134.59,37.41 TEMP_TRIM1.1 134.62,36.93 134.62,28.42 CURRENT_TRIM1.1 | 124.92,52.15 v124.92,52.98 | 126.19,50.88 126.87,50.88 IC10.12 | v112.75,58.24 112.75,58.42
  Bottom 0.406: 122.07,5.21 SV10.9 | v112.75,58.24 117.83,58.24 123.09,52.98 v124.92,52.98
  other vias: 116.84,50.8 114.3,40.64 119.38,27.94 143.51,27.94 142.24,59.69 127.64,61.59 93.98,39.37 124.46,11.43 144.78,35.56 143.51,41.91 105.41,48.26 137.79,17.78 128.27,58.42
  pour Top: 80.01,74.93 80.01,1.27 153.67,1.27 153.67,74.93
  pour Bottom: 80.01,74.93 153.67,74.93 153.67,1.27 80.01,1.27
GND4  (via drill 0.61)
  Top 0.406: 6103CAP18.2 191.49,137.16 | 191.49,137.16 3V9.3 | UNDER_WARN2.1 226.06,106.98 OVER_WARN2.1 226.06,116.05 UNDER_CRIT2.1 226.06,124.94 226.06,133.63 OVER_CRIT2.1 | 213.34,124.74 UNDER_TRIM2.1 | 213.34,116.15 TEMP_TRIM2.1 213.36,115.67 213.36,107.16 CURRENT_TRIM2.1 | 203.66,130.89 v203.66,131.72 | 204.93,129.62 205.61,129.62 IC13.12 | v191.49,136.98 191.49,137.16
  Bottom 0.406: 200.81,83.95 SV11.9 | v191.49,136.98 196.57,136.98 201.83,131.72 v203.66,131.72
  other vias: 195.58,129.54 193.04,119.38 198.12,106.68 222.25,106.68 220.98,138.43 206.38,140.34 172.72,118.11 203.2,90.17 223.52,114.3 222.25,120.65 184.15,127 216.53,96.52 207.01,137.16
  pour Top: 158.75,153.67 158.75,80.01 232.41,80.01 232.41,153.67
  pour Bottom: 158.75,153.67 232.41,153.67 232.41,80.01 158.75,80.01
GND5  (via drill 0.61)